# Altium PCB handheld_main.PcbDoc
Units mil, origin at the board's own origin, x right, y up, seen from the top; angles counter-clockwise.
Board outline 2750 x 3975 mil, 2 copper layers (Top Layer, Bottom Layer), stack 65.792 mil thick; 73 components, 71 nets, 286 pads, 0 vias.
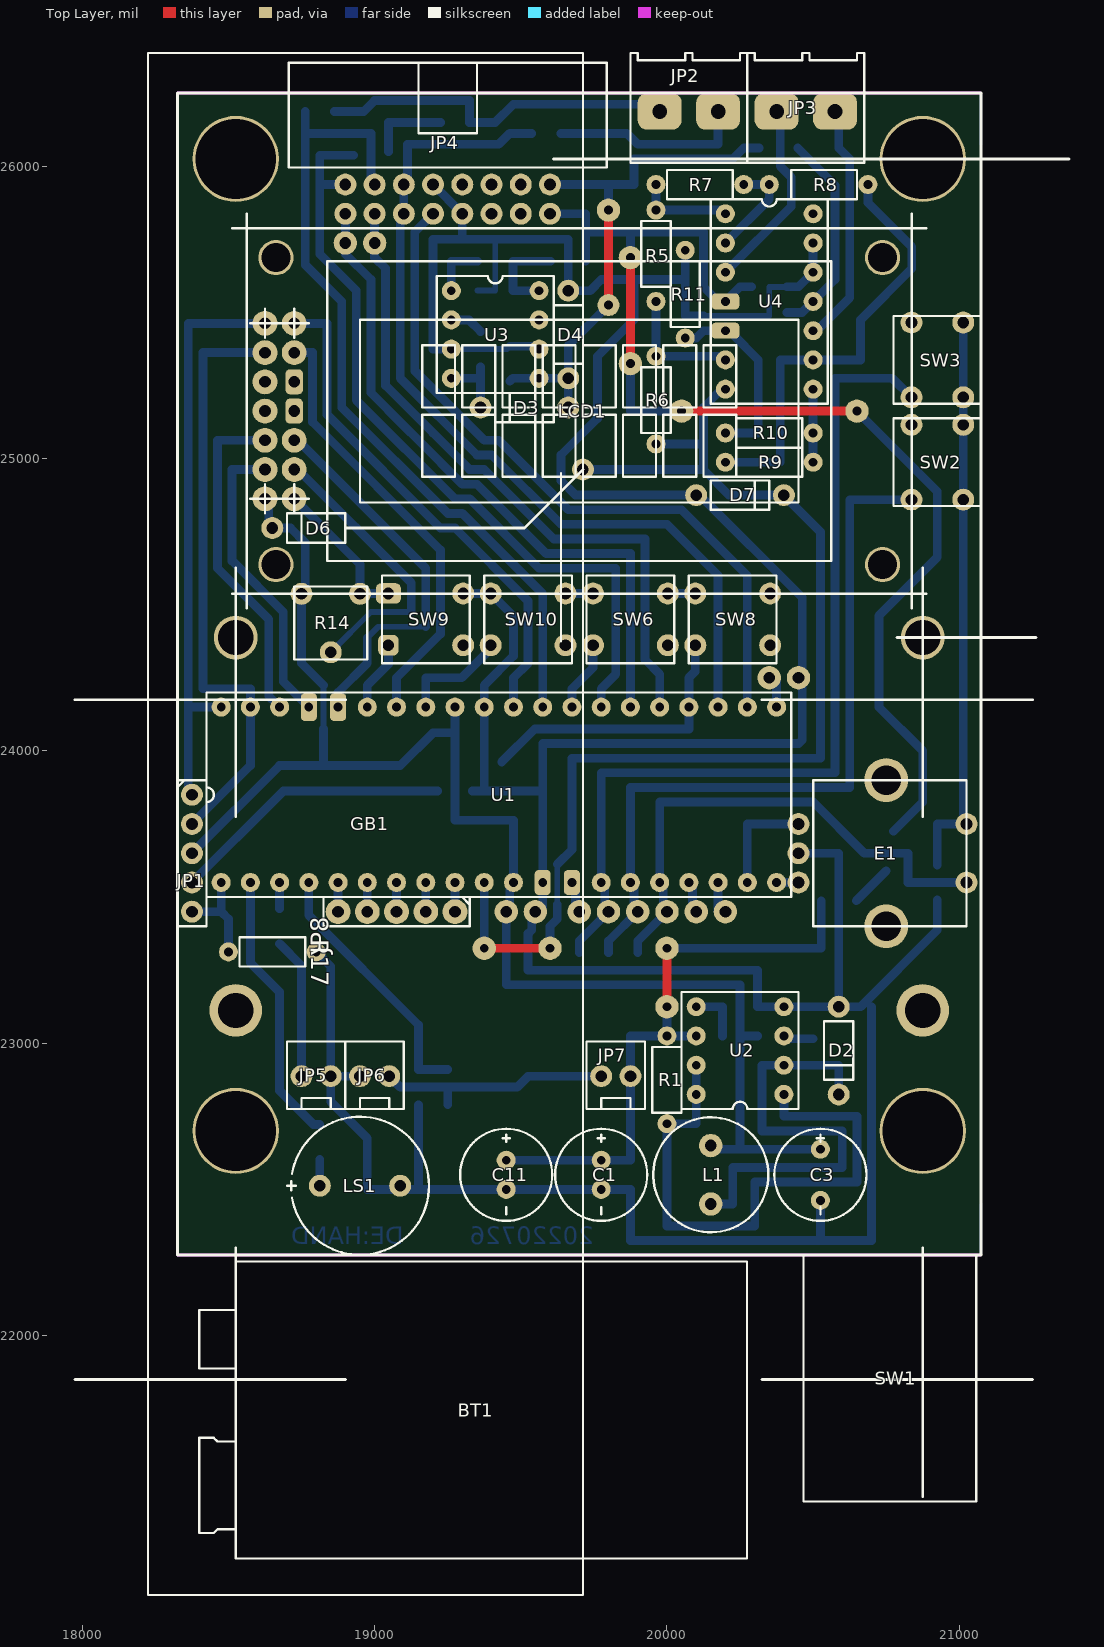
[diagram p0: Top Layer view]
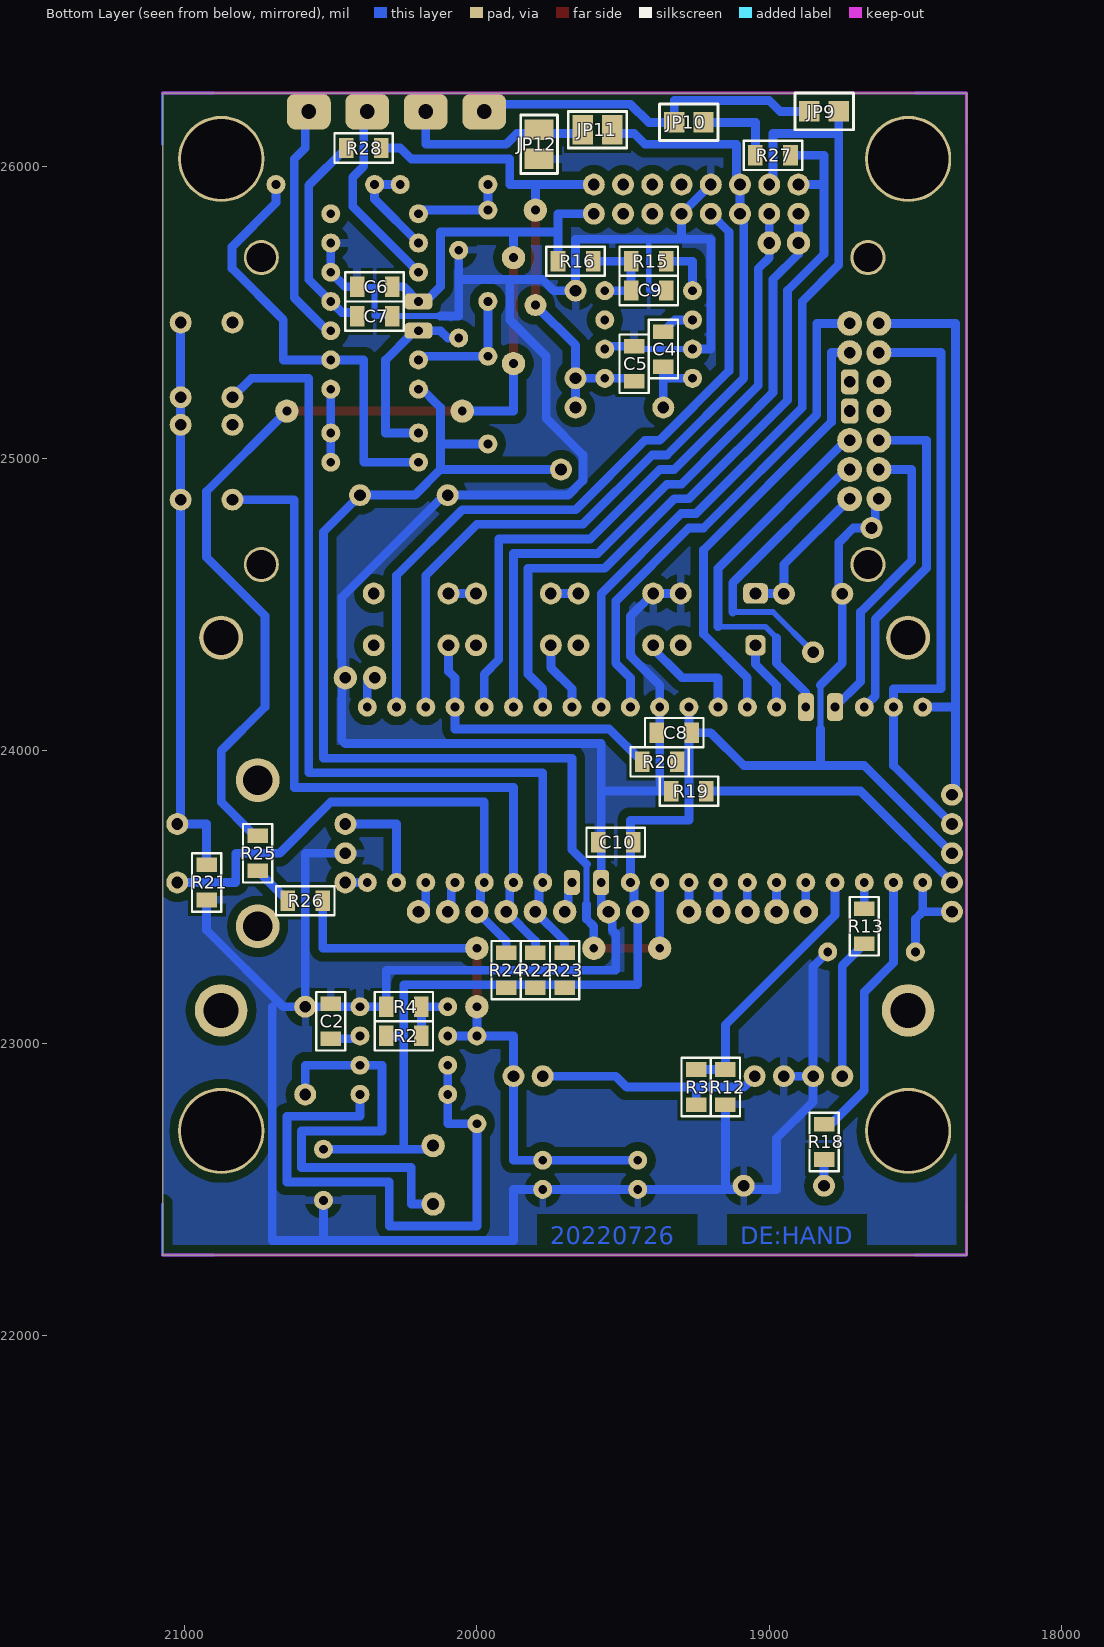
[diagram p1: Bottom Layer view, seen from below]
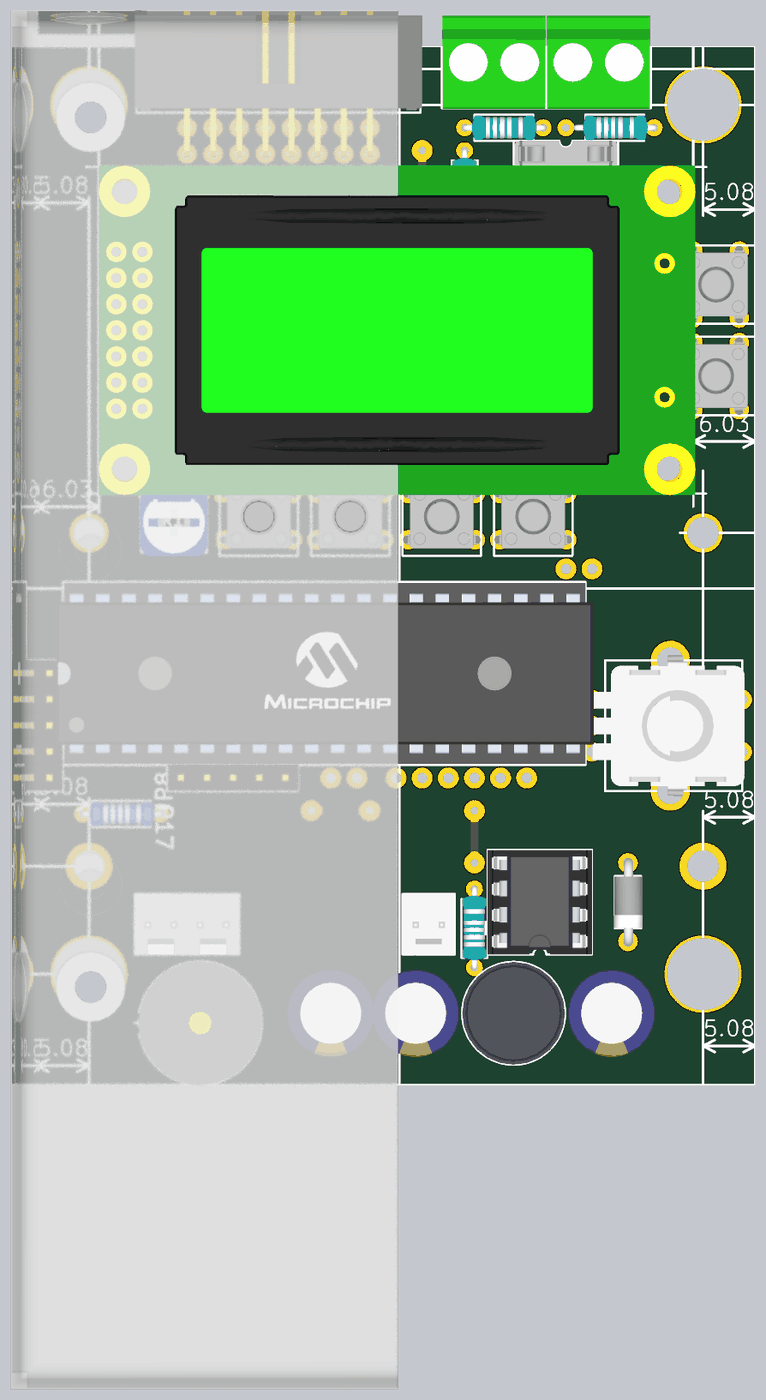
[diagram p2: 3D render of the assembled board from above, using the file's embedded part models]
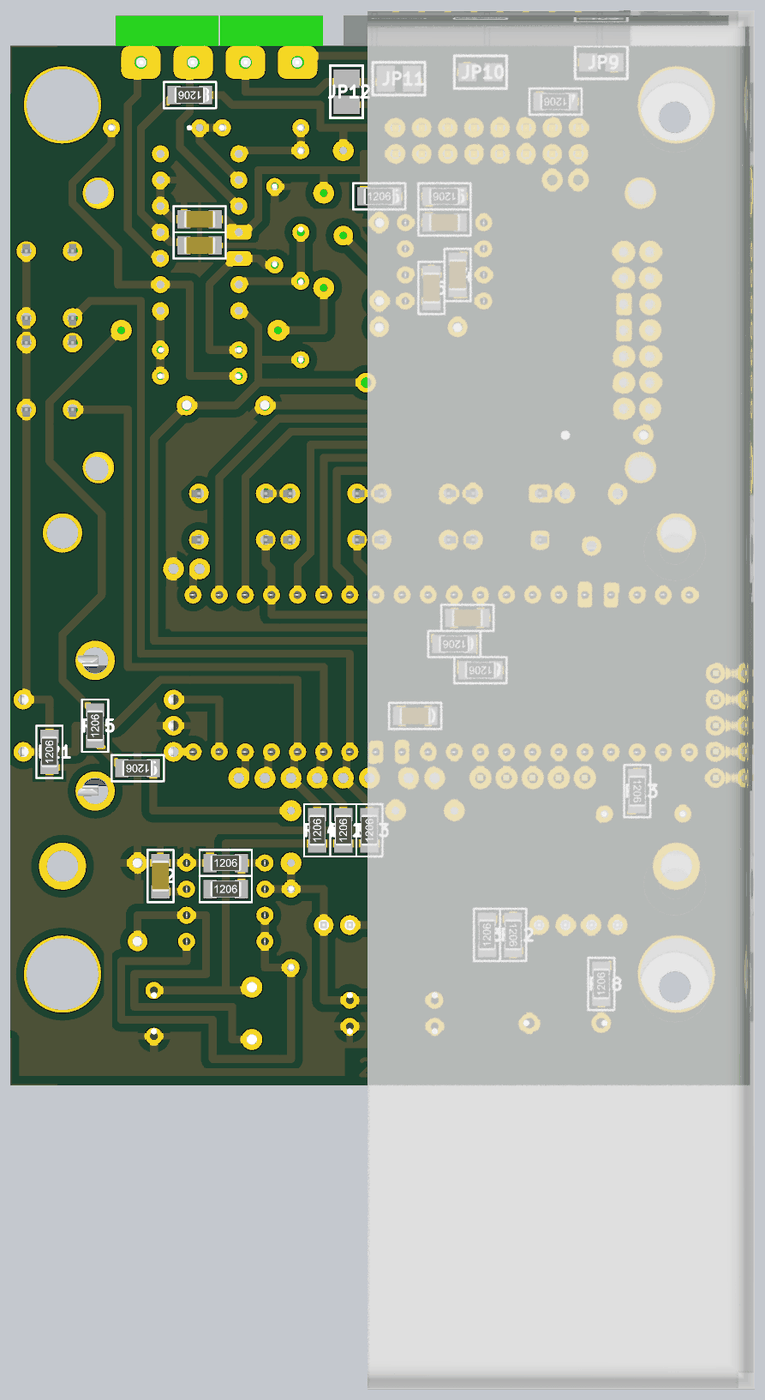
[diagram p3: 3D render of the assembled board from below, using the file's embedded part models]

## Layer stack, top to bottom
Top Layer: signal copper 1.4
Dielectric: core 62.9921, FR-4, Dk 4.8
Bottom Layer: signal copper 1.4

## Board outline
18325,22275 21075,22275 21075,26250 18325,26250

## Design rules (kind name [scope] priority, off if disabled: settings)
Clearance [All] p1: gap=30
FabricationTestPointUsage TestPointUsage [All] p1: valid=0 allowmultiple=FALSE
FabricationTestpoint Testpoint [All] p1: side=3 testpointundercomponent=TRUE minsize=40 maxsize=100 preferedsize=60 minholesize=0 maxholesize=40 preferedholesize=32 testpointgrid=1 allowsidetop=TRUE allowsidebottom=TRUE usegrid=TRUE gridtolerance=0.01
HoleSize [All] p1: absolutevalues=TRUE maxlimit=300 minlimit=1 maxpercent=80.000 minpercent=20.000
MinimumAnnularRing [All] p1: minimumring=10
PolygonConnect [All] p1: connectstyle=Relief reliefconductorwidth=25 reliefentries=4 polygonreliefangle="90 Angle"
RoutingVias [All] p1: holewidth=28 width=50 viastyle="Through Hole" minholewidth=28 minwidth=50 maxholewidth=28 maxwidth=50
SilkscreenOverComponentPads [All] p1: minsilkscreentomaskgap=10
SolderMaskExpansion [All] p1: expansion=4
Width [All] p1: maxlimit=1000 minlimit=10 preferedwidth=15
24 further rules are at their usual default settings.

## Classes and differential pairs
component class handheld_main: D6 D7 E1 JP1 JP2 JP3 JP4 JP5 JP8 JP9 JP10 JP11 JP12 LCD1 LS1 R3 R5 R6 R7 R8 R9 R10 R11 R12 R13 R14 R17 R18 R20 R22 R23 R24 R27 SW2 SW3 SW6 SW8 SW9 SW10 U1 U4
component class handheld_circuits: BT1 C1 C2 C3 C4 C5 C6 C7 C8 C9 C10 C11 D2 D3 D4 GB1 JP6 JP7 L1 R1 R2 R4 R15 R16 R19 R21 R25 R26 R28 SW1 U2 U3

## Components (designator, comment, footprint, x,y, rotation, side; value= is the part's Value field where it differs from the comment)
BT1 "Battery 9V" BAT_9V 18400,21237.5 r90 top
C1 "Cap Pol" C_EL_8X11-5#1 19775,22550 r270 top
C2 "Cap" c1206 20500,23075 r270 bottom
C3 "Cap Pol" C_EL_8X11-5#2 20525,22550 r270 top
C4 "Cap" c1206 19362.5,25374.51 r90 bottom
C5 "Cap" c1206 19462.5,25324.51 r270 bottom
C6 "Cap" c1206 20350,25587.5 r180 bottom
C7 "Cap" c1206 20350,25487.5 r0 bottom
C8 "Cap" c1206 19325,24062.5 r180 bottom
C9 "Cap" c1206 19412.5,25575 r0 bottom
C10 "Cap" c1206 19525,23687.5 r180 bottom
C11 "Cap Pol" C_EL_8X11-5#1 19450,22550 r270 top
D2 "1N5819" d_do41#1 20587.5,22975 r270 top
D3 "1N5819" d_do41#1 19512.5,25174.51 r180 top
D4 "1N5819" d_do41#1 19662.5,25424.51 r90 top
D6 "1N5819" d_do41#2 18800,24762.5 r180 top
D7 "1N5819" d_do41#1 20250,24875 r0 top
E1 "Incremental Encoder" encoder 20450,23750 r270 top
GB1 "Gabinete Chillemi" PLA_GAB_HAND_HALF 18962.5,26387.5 r0 top
JP1 "Header5x1" HDR5x1 18375,23850 r270 top
JP2 "XY128V-A2P" bornera2 20275,26287.5 r0 top (schematic designator JP6)
JP3 "XY128V-A2P" bornera2 20675,26287.5 r0 top
JP4 "IDC 8x2 90deg" idc8x2_90 18900,25837.5 r0 top
JP5 "Header2x1" CONPOL2X1 18800,22887.5 r180 top
JP6 "Header2x1" CONPOL2X1 19000,22887.5 r180 top (schematic designator JP2)
JP7 "XY128V-A2P" CONPOL2X1 19825,22887.5 r180 top
JP8 "Header5x1" HDR5X1 19275,23450 r180 top
JP9 "Jumper 2 contactos; Soldadura" JUMPER2#1 18812.5,26187.5 r180 bottom
JP10 "Jumper 2 contactos; Soldadura" JUMPER2#1 19275,26150 r180 bottom
JP11 "Jumper 2 contactos; Soldadura" JUMPER2#2 19587.5,26125 r180 bottom
JP12 "Jumper 2 contactos; Soldadura" JUMPER2#2 19787.5,26075 r270 bottom
L1 "Inductor" L_10X12 20150,22550 r90 top
LCD1 "LCD 8X2" LCD_0802 18562.5,25787.5 r270 top
LS1 "5V" ENC_SON_BUZ_12MM 18950,22512.5 r0 top
R1 "Resistencia 1W; 100Kohm" RES300TH#1 20000,22875 r90 top
R2 "Resistencia 1206; 1Kohm" R1206 20250,23025 r180 bottom
R3 "Resistencia 1206; 1Kohm" R1206 19250,22850 r90 bottom
R4 "Resistencia 1206; 1Kohm" R1206 20250,23125 r180 bottom
R5 "Resistencia 1206; 1Kohm" RES300TH#2 19962.5,25700 r270 top
R6 "Resistencia 1206; 1Kohm" RES300TH#1 19962.5,25200 r270 top
R7 "Resistencia 1206; 1Kohm" RES300TH#1 20112.5,25937.5 r0 top
R8 "Resistencia 1206; 1Kohm" RES300TH#3 20537.5,25937.5 r0 top
R9 "Resistencia 1206; 1Kohm" RES300TH#1 20350,24987.5 r0 top
R10 "Resistencia 1206; 1Kohm" RES300TH#1 20350,25087.5 r180 top
R11 "Resistencia 1206; 1Kohm" RES300TH#1 20062.5,25562.5 r90 top
R12 "Resistencia 1206; 1Kohm" R1206 19150,22850 r270 bottom
R13 "Resistencia 1206; 1Kohm" R1206 18675,23400 r270 bottom
R14 "Preset" PRESET6 18850,24437.5 r180 top
R15 "Resistencia 1206; 0ohm" R1206 19412.5,25675 r0 bottom
R16 "R 0ohm" R1206 19662.5,25675 r180 bottom
R17 "Resistencia 1206; 1Kohm" RES300TH#1 18650,23312.5 r0 top
R18 "Resistencia 1206; 1Kohm" R1206 18812.5,22662.5 r90 bottom
R19 "R 0ohm" R1206 19275,23862.5 r0 bottom
R20 "Resistencia 1206; 1Kohm" R1206 19375,23962.5 r0 bottom
R21 "R 0ohm" R1206 20925,23550 r90 bottom
R22 "Resistencia 1206; 1Kohm" R1206 19800,23250 r90 bottom
R23 "Resistencia 1206; 1Kohm" R1206 19700,23250 r90 bottom
R24 "Resistencia 1206; 1Kohm" R1206 19900,23250 r90 bottom
R25 "R 0ohm" R1206 20750,23650 r90 bottom (schematic designator R24)
R26 "R 0ohm" R1206 20587.5,23487.5 r0 bottom (schematic designator R24)
R27 "R 0ohm" R1206 18987.5,26037.5 r0 bottom
R28 "R 0ohm" R1206 20387.5,26062.5 r0 bottom (schematic designator R24)
SW1 "Tecla (sin pads)" SW_TECLA_NO_PADS 20762.5,21850 r180 top
SW2 "SW_T_17-5MM" SW_T_17-5MM#1 20925,24987.5 r270 top
SW3 "SW_T_17-5MM" SW_T_17-5MM#1 20925,25337.5 r270 top
SW6 "SW_T_17-5MM" SW_T_17-5MM#1 19875,24450 r0 top
SW8 "SW_T_17-5MM" SW_T_17-5MM#1 20225,24450 r0 top
SW9 "SW_T_17-5MM" SW_T_17-5MM#2 19175,24450 r0 top
SW10 "SW_T_17-5MM" SW_T_17-5MM#1 19525,24450 r0 top
U1 "PIC18F46K80" DIP40Z_MICROCHIP 18475,23550 r90 top
U2 "MC34063" dip8z 20400,22825 r180 top
U3 "ICL7660S" DIP8Z 19262.5,25574.51 r0 top
U4 "TL084" DIP14Z 20200,25837.5 r0 top

## Footprints (in the part's own frame and the unit in brackets; to place one, negate y for a bottom-side part, rotate by r counter-clockwise, add the part's x,y. Pads: shape width x height; smd on the part's side, far side on the other; paste and mask are expansions set on the pad)
BAT_9V [mil]
  silkscreen extent 0,-1874 1016,0, body extent 0,-1874 1016,0, height 456
bornera2 [mil]
  rrect50% 150x125 hole 50: 1(-300,-100) 2(-100,-100)
  silkscreen extent -400,-275 0,100, body extent -397,-277 -3,77, height 531
c1206 [mil]
  rect 50x70 smd: 1(-60,0) 2(60,0)
  silkscreen extent -100,-50 100,50, body extent -63,-31 63,31, height 33
C_EL_8X11-5#1 [mil]
  round 65 hole 30: 1(-50,0) 2(50,0)
  silkscreen extent -157,-157 157,157, body extent -167,-167 166,167, height 512
C_EL_8X11-5#2 [mil]
  round 65 hole 30: 1(-87.5,0) 2(87.5,0)
  silkscreen extent -157,-157 157,157, body extent -167,-167 166,167, height 512
CONPOL2X1 [mil] "CONECTOR POLARIZADO 2x1"
  round 75 hole 40: 1(-50,0) 2(50,0)
  silkscreen extent -100,-119 100,113, body extent -100,-118 100,113, height 460
d_do41#1 [mil]
  round 75 hole 40: 1(-150,0) 2(150,0)
  silkscreen extent -100,-50 100,50, body extent -168,-53 168,57, height 122
d_do41#2 [mil]
  round 75 hole 40: 1(-912.5,-200) 2(150,0)
  silkscreen extent -100,-50 100,50, body extent -168,-53 168,57, height 122
dip8z [mil]
  round 65 hole 30: 1(0,0) 2(0,-100) 3(0,-200) 4(0,-300) 5(300,-300) 6(300,-200) 7(300,-100) 8(300,0)
  silkscreen extent -50,-350 350,50, body extent -50,-350 350,50, height 311
DIP8Z [mil] "ZOCALO DIP 8"
  round 65 hole 30: 1(0,0) 2(0,-100) 3(0,-200) 4(0,-300) 5(300,-300) 6(300,-200) 7(300,-100) 8(300,0)
  silkscreen extent -50,-350 350,50, body extent -50,-350 350,50, height 311
DIP14Z [mil] "ZOCALO DIP14"
  round 65 hole 30: 1(0,0) 2(0,-100) 3(0,-200) 6(0,-500) 7(0,-600) 8(300,-600) 9(300,-500) 10(300,-400) 11(300,-300) 12(300,-200) 13(300,-100) 14(300,0)
  rrect50% 95x55 hole 30: 4(0,-300) 5(0,-400)
  silkscreen extent -50,-650 350,50, body extent -47,-650 347,50, height 200
DIP40Z_MICROCHIP [mil] "DIP40 ZOCALO"
  round 65 hole 30: 1(0,0) 2(0,-100) 3(0,-200) 4(0,-300) 5(0,-400) 6(0,-500) 7(0,-600) 8(0,-700) 9(0,-800) 10(0,-900) 11(0,-1000) 14(0,-1300) 15(0,-1400) 16(0,-1500) 17(0,-1600) 18(0,-1700) 19(0,-1800) 20(0,-1900) 21(600,-1900) 22(600,-1800) 23(600,-1700) 24(600,-1600) 25(600,-1500) 26(600,-1400) 27(600,-1300) 28(600,-1200) 29(600,-1100) 30(600,-1000) 31(600,-900) 32(600,-800) 33(600,-700) 34(600,-600) 35(600,-500) 38(600,-200) 39(600,-100) 40(600,0)
  rrect50% 85x55 hole 30: 12(0,-1100) 13(0,-1200)
  rrect50% 95x55 hole 30: 36(600,-400) 37(600,-300)
  silkscreen extent -50,-1950 650,50, body extent -46,-1981 646,76, height 313
ENC_SON_BUZ_12MM [mil] "BUZZER"
  round 75 hole 40: 1(-137.5,0) 2(137.5,0)
  silkscreen extent -250,-236 236,236, body extent -236,-236 236,236, height 374
encoder [mil] "ENCODER"
  round 75 hole 40: 1(0,0) 2(100,0) 3(200,0) 4(0,575) 5(200,575)
  round 150 hole 100: 6(-150,300) 7(350,300)
  silkscreen extent -150,50 350,575, body extent -169,0 369,584, height 835
HDR5x1 [mil] "HEADER 5x1"
  round 75 hole 40: 1(0,0) 2(100,0) 3(200,0) 4(300,0) 5(400,0)
  silkscreen extent -50,-50 450,50, body extent -51,-51 449,49, height 336
HDR5X1 [mil] "HEADER 5x1"
  round 85 hole 40: 1(0,0) 2(100,0) 3(200,0) 4(300,0) 5(400,0)
  silkscreen extent -50,-50 450,50, body extent -51,-51 449,49, height 336
idc8x2_90 [mil]
  round 75 hole 40: 1(0,0) 2(0,100) 3(100,0) 4(100,100) 5(200,0) 6(200,100) 7(300,0) 8(300,100) 9(400,0) 10(400,100) 11(500,0) 12(500,100) 13(600,0) 14(600,100) 15(700,0) 16(700,100)
  silkscreen extent -194,158 894,517, body extent -199,-12 899,529, height 358
JUMPER2#1 [mil]
  rect 70x70 smd: 1(-50,0) 2(50,0)
  silkscreen extent -100,-63 100,63
JUMPER2#2 [mil]
  rect 70x100 smd: 1(-50,0) 2(50,0)
  silkscreen extent -100,-63 100,63
L_10X12 [mil] "L_10X12"
  round 80 hole 40: 1(-100,0) 2(100,0)
  silkscreen extent -197,-197 197,197, body extent -197,-197 197,197, height 471
LCD_0802 [mil]
  round 120 hole 100: 0(100,2175) 0(100,100) 0(1150,2175) 0(1150,100)
  round 85 hole 40: 1(925,162.5) 2(925,62.5) 3(825,162.5) 4(825,62.5) 5(725,162.5) 6(725,62.5) 8(625,62.5) 10(525,62.5) 11(425,162.5) 12(425,62.5) 13(325,162.5) 14(325,62.5)
  rrect50% 85x60 hole 40: 7(625,162.5) 9(525,162.5)
  silkscreen extent 0,0 1250,2275, body extent -5,0 1255,2283, height 717
PLA_GAB_HAND_HALF [mil] "DISIPADOR"
  silkscreen extent -738,-5275 750,0, body extent -738,-5276 745,0, height 565
PRESET6 [mil]
  round 75 hole 40: 1(-100,-100) 2(0,100) 3(100,-100)
  silkscreen extent -125,-125 125,125, body extent -128,-137 128,137, height 293
R1206 [mil]
  rect 50x70 smd: 1(-60,0) 2(60,0)
  silkscreen extent -100,-50 100,50, body extent -63,-31 63,31, height 34
RES300TH#1 [mil] "RESISTENCIA THROUGH-HOLE"
  round 65 hole 30: 1(-150,0) 2(150,0)
  silkscreen extent -112,-50 112,50, body extent -159,-47 162,47, height 98
RES300TH#2 [mil] "RESISTENCIA THROUGH-HOLE"
  round 65 hole 30: 1(-150,0) 2(162.5,0)
  silkscreen extent -113,-50 113,50, body extent -159,-47 162,47, height 98
RES300TH#3 [mil] "RESISTENCIA THROUGH-HOLE"
  round 65 hole 30: 1(-187.5,0) 2(150,0)
  silkscreen extent -112,-50 112,50, body extent -159,-47 162,47, height 98
SW_T_17-5MM#1 [mm] "PULSADOR DE 2 CONTACTOS, 4 TERMINALES"
  round 1.905 hole 1.016: 1(3.25,-2.25) 2(3.25,2.25) 3(-3.25,-2.25) 4(-3.25,2.25)
  silkscreen extent -3.81,-3.81 3.81,3.81, body extent -3.95,-3.1 3.95,3.1, height 17
SW_T_17-5MM#2 [mm] "PULSADOR DE 2 CONTACTOS, 4 TERMINALES"
  round 1.905 hole 1.016: 1(3.25,-2.25) 2(3.25,2.25)
  rrect50% 1.778x1.778 hole 1.016: 3(-3.25,-2.25)
  rrect50% 2.159x1.778 hole 1.016: 4(-3.25,2.25)
  silkscreen extent -3.81,-3.81 3.81,3.81, body extent -3.95,-3.1 3.95,3.1, height 17
SW_TECLA_NO_PADS [mil]
  silkscreen extent -295,-425 295,418, body extent -295,-425 295,418, height 732

## Part data
C1 C3 C11: "Capacitor Polarizado"
C2 C4 C5 C6 C7 C8 C9 C10: "Capacitor"
D2 D3 D4 D6 D7: "Schottky Diode 1A 40V"
E1: "Incremental Encoder with Switch"
GB1: library part "Gabinete Chillemi P37; Cuerpo Negro"
JP1 JP8: "Header 5x1"
JP2 JP3 JP7: library part "Bornera Tornillos 2x1; Altura = 13.8mm", "Bornera Tornillos 2x1; Altura = 13.8mm"
JP5 JP6: "Header 2x1"
LS1: library part Buzzer, "Buzzer"
R14: "Resistencia Variable"
R16 R19 R21 R25 R26 R27 R28: library part "Resistencia 1206; 0ohm", "Resistencia 1206; 0ohm"
U1: library part PIC18F4620, "FLASH Microcontroller"
U2: "DC-to-DC Converter Control Circuit"
U3: "Switched Capacitor Voltage Converter"
U4: "JFET-Input Operational Amplifier"

## Free pads (board coordinates)
  round 295 hole 275: 0(18525,26025) 1(18525,22700) 1(20875,22700) 1(20875,26025)
  round 75 hole 30: 0(19800,25525)
  round 80 hole 30: 0(19875,25687.5) 1(19375,23325) 1(19600,23325) 1(19800,25850) 1(19875,25325) 1(20000,23125) 1(20000,23325) 1(20050,25162.5) 1(20650,25162.5)
  round 180 hole 120: 1(18525,23112.5) 1(20875,23112.5)
  round 150 hole 120: 1(18525,24387.5) 1(20875,24387.5)
  round 80 hole 40: 1(18900,25737.5) 1(19000,25737.5) 1(19450,23450) 1(19550,23450) 1(19700,23450) 1(19800,23450) 1(19900,23450) 1(20000,23450) 1(20100,23450) 1(20200,23450) 1(20350,24250) 1(20450,24250)

## Nets (pads, with @x,y where several pads share a name; then routed paths per layer and width w, separated by ;. In a path a pad name is that pad's centre, name@x,y a point inside that pad or via, vN(x,y) a via of type N, cw(c..) or ccw(c..) an arc to the next point about the centre after c; other vN are vias at no path point)
+5V: C3.1 C8.2 C10.2 D6.2 JP1.3 L1.2 LCD1.2 pad.1@19450,23450 R2.1 R14.3 R20.1 R22.1 R23.1 R24.1 U1.11 U1.32 | length 5045.1
  Bottom Layer w20: 18825,24075 18825,24225
  Bottom Layer w30: JP1.3 18675,23950 18825,23950 ; LCD1.2 LCD1.2@18650,24862.5 ; D6.2@18637.5,24762.5 LCD1.2@18637.5,24862.5 ; D6.2 18712.5,24762.5 18762.5,24712.5 R14.3@18762.5,24537.5 ; R14.3 18750,24300 18825,24225 ; 18825,24075 18825,23950 ; C8.2 19200,24062.5 19087.5,23950 18825,23950 ; U1.32@19265,24150 U1.32 19275,23762.5 19475,23762.5 U1.11 ; pad.1@19450,23450 19450,23200 20250,23200 20250,23025 ; pad.1@19462.5,23450 U1.11@19462.5,23550 ; L1.2 20150,22637.5 C3.1@20500,22637.5 ; 20250,22650 20250,23025 ; R2.1 20250,23025
+9V: C1.1 C11.1 JP7.1 pad.1@20000,23125 pad.1@20000,23325 R1.2 R26.1 U2.6 | length 2065
  Top Layer w30: pad.1@20000,23125 pad.1@20000,23325
  Bottom Layer w30: C11.1 C1.1 19875,22600 19875,23025 R1.2 ; pad.1@20000,23125 R1.2 ; pad.1@20000,23325 20527.5,23325 R26.1 ; U2.6 R1.2
+9V1: C9.2 R15.2 R16.2 U3.8 | length 320.2
  Bottom Layer w30: R15.2 R16.2 ; R15.2@19472.99,25674.51 19472.99,25574.51 U3.8 U3.8@19562.99,25574.03
+9V2: C6.2 JP4.15 pad.0@19875,25687.5 pad.1@19875,25325 pad.1@20050,25162.5 pad.1@20650,25162.5 R16.1 R25.2 U4.4 | length 4206.7
  Top Layer w30: pad.1@19875,25325 pad.0@19875,25687.5 ; pad.1@20050,25162.5 pad.1@20650,25162.5
  Bottom Layer w30: JP4.15 19722.5,25837.5 19722.5,25775 ; R16.1 19722.5,25775 ; pad.1@19875,25325 19875,25162.5 pad.1@20050,25162.5 ; pad.0@19875,25687.5 19875,25775 ; C6.2 20250,25587.5 U4.4 20175,25537.5 20125,25587.5 20125,25775 19875,25775 ; pad.1@20650,25162.5 20925,24887.5 20925,24662.5 20725,24462.5 20725,24150 20875,24000 20875,23825 R25.2@20775,23725 ; 19722.5,25775 19875,25775
-9V: C5.2 D3.1 D4.1 JP4.16 pad.0@19800,25525 pad.1@19800,25850 R28.1 U3.5 | length 1842.1
  Top Layer w30: pad.0@19800,25525 pad.1@19800,25850
  Bottom Layer w30: C5.2 19472.5,25274.51 U3.5 D4.1 ; JP4.16 19800,25937.5 ; D3.1 D4.1 ; pad.0@19800,25525 19662.5,25387.5 D4.1 ; pad.1@19800,25850 19800,25937.5 ; R28.1@20315,26062.5 20262.5,26062.5 20225,26025 19887.5,26025 19887.5,25937.5 19800,25937.5
-9V1: C7.2 R28.2 U4.11 | length 714.4
  Bottom Layer w30: C7.2@20410,25500 20462.5,25500 U4.11 20575,25612.5 20575,25935 R28.2
ADJ: LCD1.3 R14.2 | length 992.5
  Bottom Layer w20: R14.2 18987.5,24475 19125,24475
  Bottom Layer w30: LCD1.3 18737.5,24962.5 19125,24575 19125,24475
ANALOG: D6.1 D7.2 pad.1@19375,23325 pad.1@19600,23325 R6.2 U1.10 U4.7 | length 4137.7
  Top Layer w30: pad.1@19375,23325 pad.1@19600,23325
  Bottom Layer w20: 19625,23475 19625,23612.5
  Bottom Layer w30: pad.1@19375,23325 U1.10 ; pad.1@19600,23325 19600,23400 19625,23425 19625,23475 ; 19625,23612.5 19675,23662.5 19675,23975 20525,23975 20525,24750 D7.2 20212.5,24875 20125,24962.5 ; D6.1 20125,24962.5 ; R6.2 20125,25050 ; U4.7@20200,25250 20125,25175 20125,25050 ; 20125,24962.5 20125,25050
"BAT CHR": R3.2 R12.1 U1.4 | length 895.3
  Bottom Layer w30: U1.4 18775,23437.5 19150,23062.5 R12.1 R3.2
BL: R13.1 U1.3 | length 90
  Bottom Layer w30: R13.1 U1.3
BUZZ: R18.2 U1.2 | length 939.1
  Bottom Layer w30: U1.2 18575,23275 18675,23175 18675,22837.5 18790,22722.5 R18.2
DAT4: LCD1.11 U1.34 | length 1518.4
  Bottom Layer w30: LCD1.11 18787.5,25362.5 18787.5,25125 19225,24687.5 19225,24400 19075,24250 U1.34
DAT5: JP1.2 LCD1.12 U1.39 | length 2070.3
  Bottom Layer w30: JP1.2 18575,23950 U1.39 18575,24212.5 18412.5,24212.5 18412.5,25362.5 LCD1.12
DAT6: LCD1.13 U1.30 | length 1759.8
  Bottom Layer w30: LCD1.13 18837.5,25462.5 18837.5,25150 19225,24762.5 19275,24762.5 19525,24512.5 19525,24300 19475,24250 U1.30
DAT7: JP1.1 LCD1.14 U1.40 | length 1992.7
  Bottom Layer w30: 18362.5,24150 U1.40 ; JP1.1 18362.5,23862.5 18362.5,25462.5 LCD1.14
EN: LCD1.6 U1.38 | length 1175.5
  Bottom Layer w30: LCD1.6 18462.5,25062.5 18462.5,24625 18637.5,24450 18637.5,24187.5 U1.38@18662.5,24162.5 ; U1.38@18662.5,24150 U1.38@18662.5,24162.5 ; U1.38 U1.38@18662.5,24162.5
GND: C1.2 C2.1 C3.2 C5.1 C6.1 C7.1 C8.1 C9.1 C10.1 C11.2 D2.1 D4.2 D7.1 E1.2 JP4.8 JP4.9 JP5.1 JP6.2 JP12.2 LS1.2 pad.1@19550,23450 pad.1@20450,24250 R4.1 R11.2 R12.2 R17.2 R19.2 R21.1 SW9.2 SW10.4 U1.12 U1.31 U2.4 U3.3 U3.6 U4.12 U4.13 | length 14737.8
  Bottom Layer w20: U3.3 19262.99,25375 19452.99,25375 C5.1 ; C9.1 19412.5,25575 19412.5,25750 ; 20125,25487.5 C7.1 20350,25487.5 20350,25587.5 C6.1
  Bottom Layer w30: R17.2 18850,23262.5 JP5.1 ; JP6.2 JP5.1 ; R12.2 19150,22500 ; JP4.8 JP4.9 19300,25750 ; U3.3 19200,25374.51 19200,25750 19412.5,25750 19662.5,25750 D4.2 19737.5,25574.51 19775.49,25612.5 19887.5,25612.5 ; SW9.2 SW10.4 19475,24460.63 19475,24325 19375,24225 U1.31 19375,23862.5 ; R19.2 19375,23862.5 ; C5.1 19552.5,25384.51 U3.6 ; pad.1@19550,23450 pad.1@19537.5,23425 ; 20062.5,25612.5 19887.5,25612.5 ; R11.2 20062.5,25487.5 20125,25487.5 ; U2.4@20400,23135 U2.4 ; C6.1 20450,25587.5 U4.12 U4.13 ; E1.2 20587.5,23650 D2.1 ; 20525,22325 C3.2 ; 20700,23125 20700,22325 20500,22325 19875,22325 19875,22500 C1.2 C11.2 19150,22500 ; R21.1 20925,23387.5 20662.5,23125 U2.4 ; JP5.1 18850,22800 18975,22675 18975,22500 19150,22500 ; 19375,23862.5 19575,23862.5 ; pad.1@19537.5,23425 19537.5,23387.5 19525,23375 19525,23250 20310,23250 R4.1 U2.4 ; pad.1@19537.5,23425 19575,23462.5 U1.12 19575,23862.5 ; 19575,23862.5 19575,24025 20450,24025 20462.5,24037.5 20462.5,24525 20112.5,24875 19687.5,24875 19637.5,24925 19637.5,25012.5 19762.5,25137.5 19762.5,25350 19887.5,25475 19887.5,25612.5
GND_B: JP1.4 R19.1 | length 969.4
  Bottom Layer w30: JP1.4 18675,23850 18687.5,23862.5 R19.1
GND_LCD: LCD1.1 R14.1 SW9.4 | length 515.2
  Bottom Layer w30: LCD1.1 18950,24637.5 R14.1@18950,24538.58 ; R14.1 R14.1@18950,24538.58 ; SW9.4 R14.1@18950,24538.58
GND_SW: E1.4 R21.2 SW2.2 SW2.4 SW3.2 SW3.4 | length 1955.5
  Bottom Layer w30: R21.2 20925,23750 E1.4@21013.58,23750 ; SW3.4 SW3.2 SW2.4 SW2.2 E1.4@21013.58,23750 ; E1.4 E1.4@21013.58,23750
MCLR: JP1.5 R17.1 U1.1 | length 347.9
  Bottom Layer w30: JP1.5 18475,23450 ; U1.1 18475,23450 ; R17.1 18500,23425 18475,23450
NetC2_2: C2.2 U2.3 | length 110
  Bottom Layer w30: U2.3 20400,23015 C2.2
NetC4_1: C4.1 D3.2 U3.4 | length 279.5
  Bottom Layer w30: U3.4 19362.5,25275 C4.1 D3.2
NetC4_2: C4.2 U3.2 | length 116.6
  Bottom Layer w30: U3.2 19322.5,25474.51 C4.2
NetD2_2: D2.2 L1.1 U2.2 | length 1562.5
  Bottom Layer w30: L1.1 20225,22450 20225,22575 20600,22575 20600,22700 20325,22700 20325,22925 U2.2 20587.5,22925 D2.2
NetJP2_1: JP2.1 JP9.1 JP10.1 | length 1228.9
  Bottom Layer w30: JP9.1 18962.5,26187.5 19000,26225 19325,26225 JP10.1 19412.5,26150 19475,26212.5 JP2.1@19975,26212.5
NetJP2_2: JP2.2 JP11.1 JP12.1 | length 690.5
  Bottom Layer w30: JP11.1@19637.5,26112.5 19862.5,26112.5 19900,26075 20175,26075 JP2.2@20175,26212.5
NetJP3_1: JP3.1 U4.3 | length 701.4
  Bottom Layer w30: U4.3 20425,25862.5 20425,25962.5 20387.5,26000 20387.5,26175 JP3.1 JP3.1@20375,26225
NetJP3_2: JP3.2 U4.10 | length 829.8
  Bottom Layer w30: U4.10@20512.5,25437.5 20625,25550 20625,26025 20587.5,26062.5 20587.5,26175 JP3.2 ; JP3.2@20575,26212.5 JP3.2@20575,26225
NetJP5_2: JP5.2 R13.2 | length 483.6
  Bottom Layer w30: R13.2 18750,23265 JP5.2
NetJP10_2: JP10.2 R27.2 | length 277.5
  Bottom Layer w30: R27.2@19047.5,26050 19047.5,26150 JP10.2
NetLS1_1: LS1.1 R18.1 | length 90
  Bottom Layer w30: LS1.1 R18.1
NetR1_1: R1.1 U2.1 U2.7 U2.8 | length 2000
  Bottom Layer w30: U2.7 U2.8 20100,22725 R1.1 20000,22375 20300,22375 20300,22525 20650,22525 20650,22750 20400,22750 U2.1
NetR2_2: R2.2 R4.2 U2.5 | length 190
  Bottom Layer w30: U2.5 R4.2 R2.2
NetR5_1: R5.1 R7.1 U4.1 | length 325
  Bottom Layer w30: R7.1 R5.1 20000,25850 U4.1@20200,25850
NetR5_2: R5.2 R6.1 U4.6 | length 425
  Bottom Layer w30: R5.2 R6.1 U4.6@20200,25350
NetR7_2: R7.2 R8.1 U4.2 | length 349.6
  Bottom Layer w30: U4.2 20350,25887.5 R8.1 R7.2
NetR8_2: R8.2 R9.1 U4.9 | length 1547.1
  Bottom Layer w30: R9.1 20387.5,24987.5 20387.5,25337.5 U4.9 20662.5,25337.5 20662.5,25475 20837.5,25650 20837.5,25725 20687.5,25875 R8.2
NetR9_2: R9.2 R10.1 U4.8 | length 262.5
  Bottom Layer w30: R9.2 R10.1 U4.8@20500,25250
NetR10_2: R10.2 R11.1 U4.5 | length 646.6
  Bottom Layer w30: R11.1 20100,25412.5 20125,25437.5 U4.5 U4.5@20200,25450 ; R10.2 20312.5,25087.5 20312.5,25337.5 U4.5@20225,25425
NetR15_1: R15.1 U3.1 | length 190.5
  Bottom Layer w30: U3.1 19262.5,25675 R15.1
NetR25_1: R25.1 R26.2 | length 145
  Bottom Layer w30: R26.2 R25.1
NetSW6_2: SW6.2 SW8.4 | length 94.1
  Bottom Layer w30: SW6.2 SW8.4
NetSW6_4: SW6.4 SW10.2 | length 94.1
  Bottom Layer w30: SW10.2 SW6.4
PIN18: pad.1@20200,23450 U1.18 | length 100
  Bottom Layer w30: pad.1@20175,23450 U1.18
RA3: JP8.5 U1.5 | length 100
  Bottom Layer w30: JP8.5 U1.5
RA4: JP8.4 U1.6 | length 100
  Bottom Layer w30: JP8.4 U1.6
RA5: JP8.3 U1.7 | length 100
  Bottom Layer w30: JP8.3 U1.7
RA7: pad.1@19700,23450 U1.13 | length 125
  Bottom Layer w30: pad.1@19675,23450 pad.1@19700,23450 ; pad.1@19687.5,23450 U1.13@19687.5,23550
RC2: pad.1@20100,23450 U1.17 | length 100
  Bottom Layer w30: pad.1@20087.5,23437.5 U1.17@20087.5,23537.5
RC4: JP4.5 JP4.6 JP11.2 U1.23 | length 3057.6
  Bottom Layer w30: JP4.5@19087.5,25837.5 19087.5,25275 19350,25012.5 19400,25012.5 19637.5,24775 20000,24775 20175,24600 U1.23 ; JP4.5 JP4.6 ; JP4.6@19112.5,25937.5 19112.5,26075 19425,26075 19462.5,26112.5 JP11.2@19537.5,26112.5
RC6: JP4.3 pad.1@19000,25737.5 U1.25 | length 2321.4
  Bottom Layer w30: JP4.3@19012.5,25825 JP4.3 19000,25687.5 19037.5,25650 19037.5,25250 19200,25087.5 19325,24962.5 19375,24962.5 19612.5,24725 19925,24725 19925,24312.5 19975,24262.5 U1.25
RC7: JP4.1 pad.1@18900,25737.5 U1.26 | length 2289.1
  Bottom Layer w30: JP4.1 18900,25700 18987.5,25612.5 18987.5,25225 19100,25112.5 19150,25062.5 19300,24912.5 19350,24912.5 19587.5,24675 19875,24675 U1.26
RD2: pad.1@20350,24250 U1.21 | length 100
  Bottom Layer w30: U1.21 pad.1@20375,24250
RD3: JP4.7 U1.22 | length 2440.8
  Bottom Layer w30: JP4.7 19137.5,25775 19137.5,25300 19375,25062.5 19425,25062.5 19662.5,24825 20050,24825 20275,24600 U1.22
RD4: JP4.2 R27.1 U1.27 | length 2713.2
  Bottom Layer w30: JP4.2 18812.5,25937.5 ; R27.1 18812.5,26037.5 18812.5,25937.5 ; U1.27 19775,24212.5 19825,24262.5 19825,24625 19562.5,24625 19325,24862.5 19275,24862.5 18937.5,25200 18937.5,25575 18812.5,25700 18812.5,25937.5
RD6: JP4.4 JP9.2 U1.29 | length 2803.3
  Bottom Layer w30: JP9.2 18762.5,26112.5 ; JP4.4@18987.5,25937.5 18987.5,26112.5 18762.5,26112.5 ; U1.29 19575,24537.5 19300,24812.5 19250,24812.5 18887.5,25175 18887.5,25537.5 18762.5,25662.5 18762.5,26112.5
RE0: JP8.2 U1.8 | length 100
  Bottom Layer w30: JP8.2 U1.8
RE1: JP8.1 U1.9 | length 100
  Bottom Layer w30: JP8.1 U1.9
RS: LCD1.4 U1.37 | length 1033.7
  Bottom Layer w30: LCD1.4 18512.5,24962.5 18512.5,24650 18687.5,24475 18687.5,24237.5 U1.37
RW: LCD1.5 U1.36 | length 1313.2
  Bottom Layer w20: 18975,24387.5 19012.5,24425 19175,24425
  Bottom Layer w30: LCD1.5@18737.5,25062.5 19175,24625 19175,24425 ; U1.36 18875,24200 18975,24300 18975,24387.5
SW0: R20.2 SW8.3 U1.24 | length 982.1
  Bottom Layer w30: R20.2 19547.5,24075 20075,24075 U1.24 20075,24250 20097.05,24272.05 SW8.3
SW1: SW6.3 U1.28 | length 241.3
  Bottom Layer w30: U1.28 19675,24212.5 19747.05,24284.55 SW6.3
SW2: SW10.3 U1.33 | length 380.7
  Bottom Layer w30: U1.33 19175,24250 19298.13,24250 SW10.3@19409.55,24361.42
SW3: SW9.3 U1.35 | length 241.3
  Bottom Layer w30: U1.35 18975,24225 19047.05,24297.05 SW9.3
SW4: pad.1@19800,23450 R23.2 SW3.1 U1.14 | length 3132.5
  Bottom Layer w30: R23.2 19700,23350 pad.1@19800,23450 ; pad.1@19775,23450 pad.1@19800,23450 ; U1.14 19775,23925 20575,23925 20575,25275 20770.96,25275 SW3.1 ; pad.1@19787.5,23450 U1.14@19787.5,23550 ; pad.1@19812.5,23450 pad.1@19800,23450
SW5: pad.1@19900,23450 R22.2 SW2.1 U1.15 | length 2564.9
  Bottom Layer w30: R22.2 19800,23350 pad.1@19900,23450 ; pad.1@19875,23450 19887.5,23450 U1.15@19887.5,23550 ; U1.15 19875,23875 20625,23875 20625,24859.55 SW2.1
SW6: E1.1 U1.19 | length 375
  Bottom Layer w30: U1.19 20275,23750 E1.1
SW7: E1.3 U1.20 | length 75
  Bottom Layer w30: U1.20 E1.3
SW8: E1.5 pad.1@20000,23450 R24.2 U1.16 | length 1778.9
  Bottom Layer w30: R24.2 19900,23350 pad.1@20000,23450 ; U1.16 19975,23825 20500,23825 20675,23650 20825,23650 20825,23550 E1.5 ; pad.1@19987.5,23450 U1.16@19987.5,23550
VBAT: JP6.1 JP7.2 R3.1 | length 816.1
  Bottom Layer w30: JP6.1 19087.5,22850 19250,22850 ; R3.1 19250,22850 ; JP7.2 19650,22887.5 19525,22887.5 19487.5,22850 19250,22850
pads on no net: E1.6 E1.7 JP4.10 JP4.11 JP4.12 JP4.13 JP4.14 LCD1.0 LCD1.7 LCD1.8 LCD1.9 LCD1.10 SW2.3 SW3.3 SW6.1 SW8.1 SW8.2 SW9.1 SW10.1 U3.7 U4.14
copper on no net: | length 1400
  Bottom Layer w10: 18325,22450 18325,22275 18500,22275 ; 18325,26075 18325,26250 18500,26250 ; 20900,22275 21075,22275 21075,22450 ; 20900,26250 21075,26250 21075,26075

## Polygon pours and split planes (outlines as drawn)
GND on Bottom Layer "Bottom Layer-No Net" (solid, remove dead copper, pour order 2): 21075,22275 21075,26312.5 18325,26312.5 18325,22200 18325,22275 21075,22275

## Keep-outs
Keep-Out Layer:
  lines w10: 21075,22275 18325,22275 18325,26250 21075,26250

## Other copper
Bottom Layer:
  text "DE:HAND" at 19100,22312.5 h60
  text "20220726" at 19750,22312.5 h60

## Silkscreen, mask and mechanical layers (free items; w line width, h text height)
Top Overlay:
  lines w7.87: 18512.5,24537.5 18612.5,24537.5 ; 18512.5,25787.5 18612.5,25787.5 ; 18562.5,24487.5 18562.5,24587.5 ; 18562.5,25737.5 18562.5,25837.5 ; 18575,24862.5 18675,24862.5 18775,24862.5 ; 18575,25462.5 18675,25462.5 18775,25462.5 ; 18625,24812.5 18625,24912.5 ; 18625,25412.5 18625,25512.5 ; 18725,24812.5 18725,24912.5 ; 18725,25412.5 18725,25512.5 ; 19637.5,24375 19637.5,24950 ; 20787.5,24537.5 20887.5,24537.5 ; 20787.5,25787.5 20887.5,25787.5 ; 20837.5,24487.5 20837.5,24587.5 ; 20837.5,25737.5 20837.5,25837.5
  lines w10: 17975,21850 18900,21850 ; 17975,24175 18900,24175 ; 18325,25050 18325,26250 ; 18525,21450 18525,22300 ; 18525,23775 18525,24625 ; 18900,24762.5 19512.5,24762.5 19712.5,24962.5 ; 19612.5,26025 21375,26025 ; 20325,21850 21250,21850 ; 20325,24175 21250,24175 ; 20787.5,24387.5 21262.5,24387.5 ; 20875,21450 20875,22300 ; 20875,23775 20875,24625 ; 21075,24000 21075,26250 ; 18325,26250 18325,22275 21075,22275 21075,26250 ; 18325,26250 21075,26250

## Dimensions
19562.5,26250 to 20987.5,26162.5 on Top Overlay
20875,24387.5 to 20875,26025 on Top Overlay
18325,26250 to 18562.5,25787.5 on Top Overlay
21075,26250 to 20837.5,25787.5 on Top Overlay
18525,26025 to 18525,24387.5 on Mechanical 1
18525,22700 to 18525,23112.5 on Top Overlay
21075,26250 to 20875,24387.5 on Top Overlay
18525,24387.5 to 18325,26250 on Top Overlay
21075,26250 to 20875,26025 on Top Overlay
18525,26025 to 18325,26250 on Top Overlay
18525,22700 to 18325,22275 on Top Overlay
20875,22700 to 21075,22275 on Top Overlay
21075,22275 to 20875,23112.5 on Top Overlay
18325,22275 to 18525,23112.5 on Top Overlay
21075,26250 to 21075,22275 on Top Overlay